# Altium PCB 51-039PCB图（源文件格式）.PcbDoc
Units mil, origin at the board's own origin, x right, y up, seen from the top; angles counter-clockwise.
Board outline 3930 x 3915 mil, 2 copper layers (Top Layer, Bottom Layer); 37 components, 63 nets, 143 pads, 0 vias.
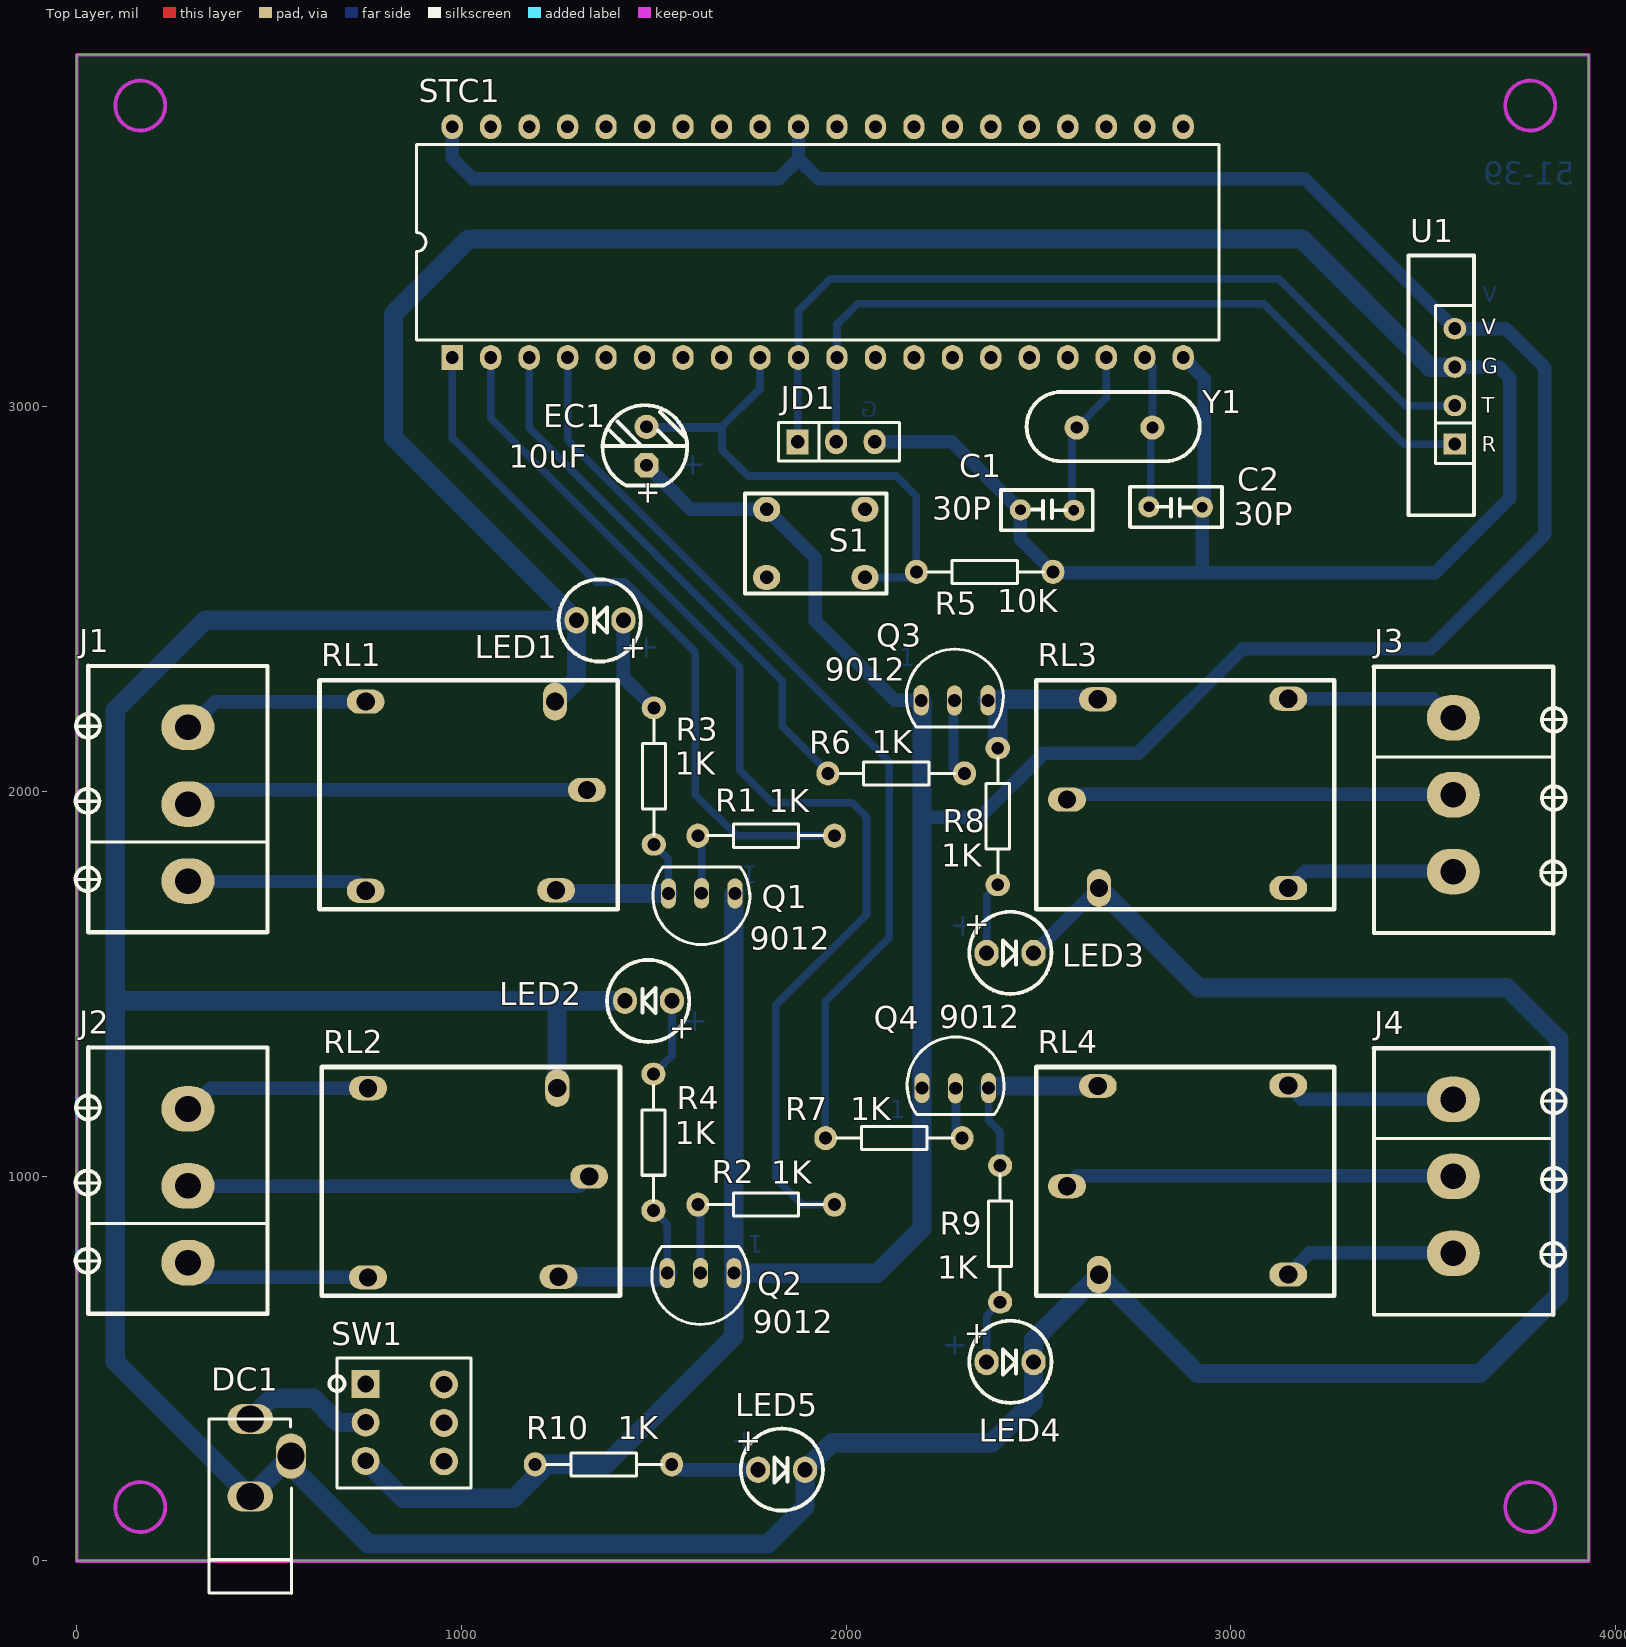
[diagram p0: Top Layer view]
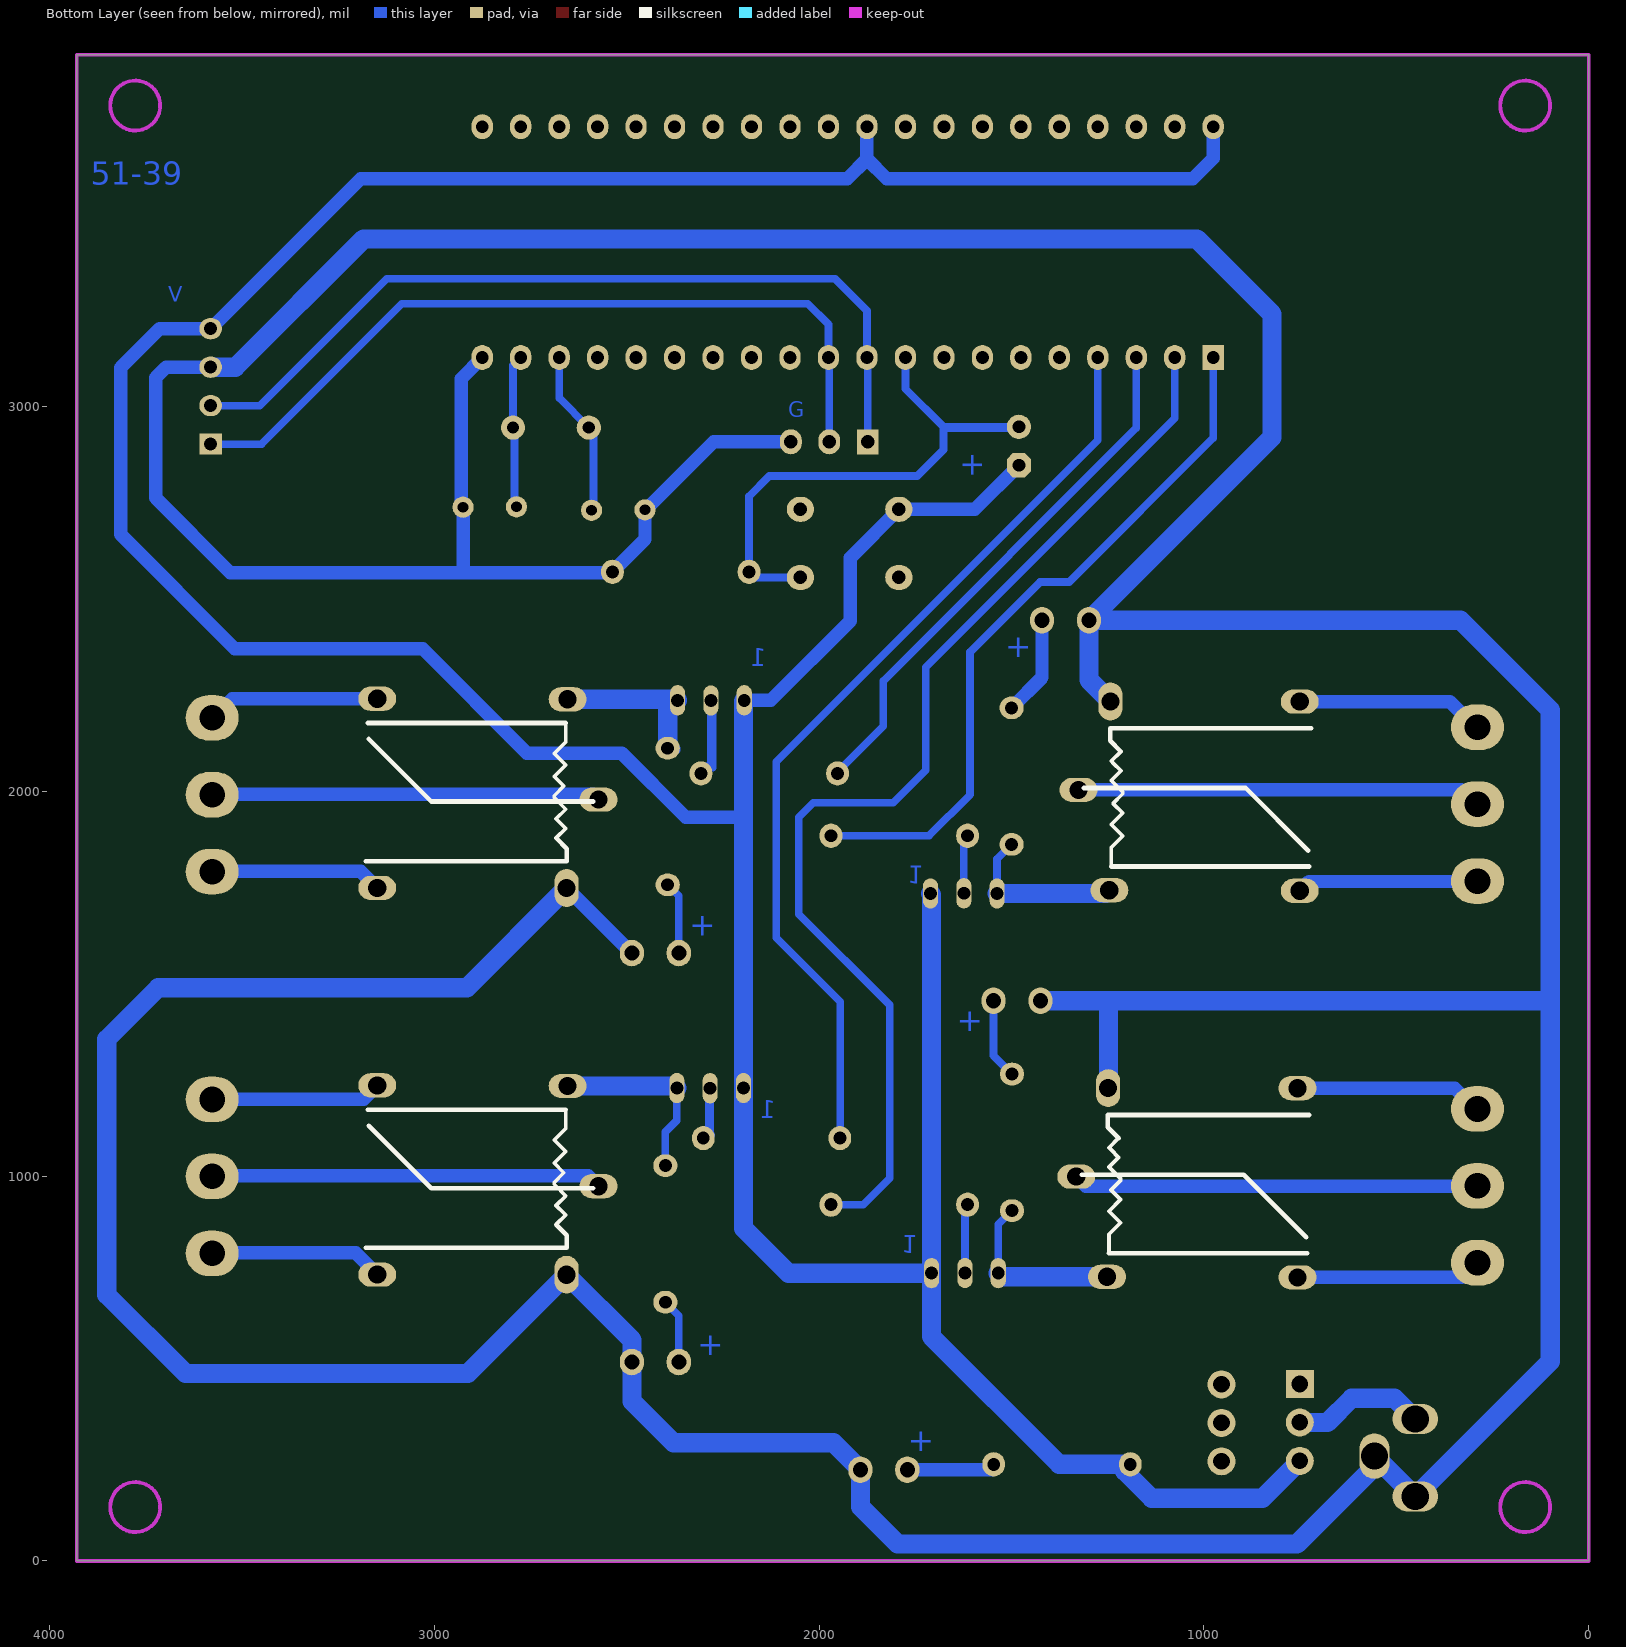
[diagram p1: Bottom Layer view, seen from below]

## Layer stack, top to bottom
Top Solder: solder mask 0.4, Solder Resist, Dk 3.5
Top Layer: signal copper 1.4
Dielectric1: dielectric 12.6, FR-4, Dk 4.8
Bottom Layer: signal copper 1.4
Bottom Solder: solder mask 0.4, Solder Resist, Dk 3.5

## Board outline
0,0 0,3915 3930,3915 3930,0

## Design rules (kind name [scope] priority, off if disabled: settings)
Clearance [All] p1: gap=12
ComponentClearance [All] p1 off: gap=10 collisioncheckmode=3 verticalgap=10 showdistances=FALSE
FabricationTestpoint [(IsPad And (OnTopLayer Or OnBottomLayer))] p1: side=3 testpointundercomponent=TRUE minsize=40 maxsize=100 preferedsize=60 minholesize=0 maxholesize=40 preferedholesize=32 testpointgrid=1 allowsidetop=TRUE allowsidebottom=TRUE usegrid=TRUE gridtolerance=0.01
Height [All] p1 off: minheight=0 maxheight=1000 prefheight=500
HoleSize [All] p1 off: absolutevalues=TRUE maxlimit=100 minlimit=1 maxpercent=80.000 minpercent=20.000
LayerPairs [All] p1 off: enforce=TRUE
PlaneClearance [All] p1 off: clearance=20
PlaneConnect [All] p1 off: planeconnectstyle=Relief reliefexpansion=20 reliefentries=4 reliefconductorwidth=10 reliefairgap=10
PolygonConnect [All] p1 off: connectstyle=Relief reliefconductorwidth=10 reliefentries=4 polygonreliefangle="90 Angle" airgapwidth=10
RoutingVias [All] p1: holewidth=28 width=50 viastyle="Through Hole" minholewidth=28 minwidth=50 maxholewidth=28 maxwidth=50
SilkToSolderMaskClearance SilkscreenOverComponentPads [IsPad] p1: minsilkscreentomaskgap=10 clearancetoexposedcopper=TRUE
SolderMaskExpansion [All] p1: expansion=4
Width [All] p1: maxlimit=100 minlimit=12 preferedwidth=20
22 further rules are at their usual default settings.

## Components (designator, comment, footprint, x,y, rotation, side; value= is the part's Value field where it differs from the comment)
C1 "30P" RAD-0.1 2453,2732 r0 top
C2 "30P" RAD-0.1 2926,2739 r180 top
DC1 "DC接口" DC-JACK-002 451,369 r270 top
EC1 "10uF" RB.1/.2 1481,2848 r90 top
J1 "端子" 5.08三芯接线端子 289,1767 r90 top
J2 "端子" 5.08三芯接线端子 289,775 r90 top
J3 "端子" 5.08三芯接线端子 3578,2191.6 r270 top
J4 "端子" 5.08三芯接线端子 3578,1199.6 r270 top
JD1 "下载口" 下载串口 1874,2909 r90 top
LED1 "YELLOW" LED_D3MM12 1421,2445 r180 top
LED2 "YELLOW" LED_D3MM12 1547,1456 r180 top
LED3 "YELLOW" LED_D3MM12 2365,1580 r0 top
LED4 "YELLOW" LED_D3MM12 2365,517 r0 top
LED5 "RED" LED_D3MM12 1771,237 r0 top
Q1 "9012" TO-92 1711,1735 r180 top
Q2 "9012" TO-92 1708,748 r180 top
Q3 "9012" TO-92 2195,2237 r0 top
Q4 "9012" TO-92 2197,1229 r0 top
R1 "1K" AXIAL0.3 1792,1885 r0 top
R2 "1K" AXIAL0.3 1792,926 r0 top
R3 "1K" AXIAL0.3 1500,2040 r90 top
R4 "1K" AXIAL0.3 1499,1088 r90 top
R5 "10K" AXIAL0.3 2360,2571 r180 top
R6 "1K" AXIAL0.3 2130,2047 r180 top
R7 "1K" AXIAL0.3 2124,1099 r180 top
R8 "1K" AXIAL0.3 2394,1935 r270 top
R9 "1K" AXIAL0.3 2400,850 r270 top
R10 "1K" AXIAL0.3 1369,251 r180 top
RL1 "SRD-05VDC-SL-C" RELAY_5V51BOARD 1326,2004 r180 top
RL2 "SRD-05VDC-SL-C" RELAY_5V51BOARD 1332,999 r180 top
RL3 "SRD-05VDC-SL-C" RELAY_5V51BOARD 2574,1979 r0 top
RL4 "SRD-05VDC-SL-C" RELAY_5V51BOARD 2574,974 r0 top
S1 "BUTTOM" BUTTOM_6X6DIP 1921,2645 r180 top
STC1 "STC89C52" STC89 981,3138 r90 top
SW1 "SW-DPDT" SW 751,460 r270 top
U1 "蓝牙MODE" 蓝牙MODE竖放 3582,2903 r0 top
Y1 "11.0592M" X_HC-49 2796,2946 r180 top

## Footprints (in the part's own frame and the unit in brackets; to place one, negate y for a bottom-side part, rotate by r counter-clockwise, add the part's x,y. Pads: shape width x height; smd on the part's side, far side on the other; paste and mask are expansions set on the pad)
5.08三芯接线端子 [mm]
  oval 3x3.5 hole 1.7: 1(0,0) 2(5.08,0) 3(10.16,0)
  silkscreen extent -3.38,-5.24 14.21,7.42
AXIAL0.3 [mm]
  oval 1.5x1.6 hole 0.85: 1(-4.508,0) 2(4.508,0)
  silkscreen extent -3.87,-0.76 3.75,0.76
BUTTOM_6X6DIP [mm]
  oval 1.8x1.65 hole 0.9: 1(-3.25,2.25) 2(3.25,-2.25) ""(-3.25,-2.25) ""(3.25,2.25)
  round 1 on Top Overlay: 3(0,0)
  silkscreen extent -4.67,-3.3 4.67,3.3
DC-JACK-002 [mm]
  oval 2x3 hole 1.8: 1(0,0) 2(5.12,0)
  oval 3x2 hole 1.8: 3(2.45,2.69)
  silkscreen extent 0,-2.73 11.51,2.73
LED_D3MM12 [mm]
  oval 1.6x1.75 hole 1: 1(0,0) 2(3.1,0)
  silkscreen extent -1.14,-2.7 4.28,2.72
RAD-0.1 [mm]
  round 1.4 hole 0.7: 1(0,0) 2(3.531,-0.025)
  silkscreen extent -1.3,-1.35 4.78,1.32
RB.1/.2 [mm]
  oct 1.6x1.6 hole 0.85: 1(0,0)
  round 1.6 hole 0.85: 2(2.54,0)
  silkscreen extent -1.35,-2.69 3.97,2.9
RELAY_5V51BOARD [mm]
  oval 2.5x1.6 hole 1.2: 1(0,0) 2(14.605,6.658) 3(14.605,-5.835) 4(2.032,6.618)
  oval 1.6x2.5 hole 1.2: 5(2.105,-5.842)
  silkscreen extent -2.03,-7.24 17.65,7.87
STC89 [mm]
  rect 1.65x1.4 hole 0.85: 1(-0.254,0.127)
  oval 1.65x1.4 hole 0.85: 2(-0.254,-2.413) 3(-0.254,-4.953) 4(-0.254,-7.493) 5(-0.254,-10.033) 6(-0.254,-12.573) 7(-0.254,-15.113) 8(-0.254,-17.653) 9(-0.254,-20.193) 10(-0.254,-22.733) 11(-0.254,-25.273) 12(-0.254,-27.813) 13(-0.254,-30.353) 14(-0.254,-32.893) 15(-0.254,-35.433) 16(-0.254,-37.973) 17(-0.254,-40.513) 18(-0.254,-43.053) 19(-0.254,-45.593) 20(-0.254,-48.133) 21(14.986,-48.133) 22(14.986,-45.593) 23(14.986,-43.053) 24(14.986,-40.513) 25(14.986,-37.973) 26(14.986,-35.433) 27(14.986,-32.893) 28(14.986,-30.353) 29(14.986,-27.813) 30(14.986,-25.273) 31(14.986,-22.733) 32(14.986,-20.193) 33(14.986,-17.653) 34(14.986,-15.113) 35(14.986,-12.573) 36(14.986,-10.033) 37(14.986,-7.493) 38(14.986,-4.953) 39(14.986,-2.413) 40(14.986,0.127)
  silkscreen extent 0.92,-50.5 13.82,2.5
SW [mm]
  rect 1.85x1.85 hole 1.1: 1(0,0)
  round 1.85 hole 1.1: 2(2.54,0) 3(5.08,0) 4(5.11,5.169) 5(2.57,5.169) 6(0.03,5.169)
  silkscreen extent -1.71,-2.4 6.88,6.96
TO-92 [mm]
  oval 1x2 hole 0.85: 1(0,0) 2(2.205,-0.009) 3(4.4,0)
  silkscreen extent -0.98,-1.75 5.42,3.38
X_HC-49 [mm]
  round 1.6 hole 0.813: 1(0,0) 2(5.004,0)
  silkscreen extent -3.12,-2.35 8.31,2.22
下载串口 [mm]
  rect 1.65x1.45 hole 0.9: 1(0,0)
  oval 1.65x1.45 hole 0.9: 2(0,-2.54) 3(0,-5.08)
  silkscreen extent -1.27,-6.72 1.27,1.27
蓝牙MODE竖放 [mm]
  rect 1.5x1.4 hole 0.85: 1(0,0)
  oval 1.5x1.4 hole 0.85: 2(0,2.54) 3(0,5.08) 4(0,7.62)
  silkscreen extent -3.05,-4.7 1.27,12.45

## Part data
C1 C2: library part CAP, "无极性电容"
DC1: "DC接口（分大小）"
EC1: library part CAP_EC, "极性电容"
J1 J2 J3 J4: library part CON3, "接线端子3芯"
JD1: "下载口2.54排针"
LED1 LED2 LED3 LED4 LED5: library part LED, "LED灯"
Q1 Q2 Q3 Q4: "直插三极管"
R1 R2 R3 R4 R5 R6 R7 R8 R9 R10: library part RES, "电阻"
RL1 RL2 RL3 RL4: library part RELAY, "继电器"
S1: "按键"
STC1: library part STC51, "51单片机"
SW1: "电源开关"
U1: "蓝牙模块"
Y1: library part "XTAL DIP", "晶振"

## Nets (pads, with @x,y where several pads share a name; then routed paths per layer and width w, separated by ;. In a path a pad name is that pad's centre, name@x,y a point inside that pad or via, vN(x,y) a via of type N, cw(c..) or ccw(c..) an arc to the next point about the centre after c; other vN are vias at no path point)
GND: C1.1 C2.1 DC1.2 DC1.3 JD1.3 LED1.2 LED2.2 LED3.2 LED4.2 LED5.2 R5.1 RL1.5 RL2.5 RL3.5 RL4.5 STC1.20 U1.3 | length 18672.9
  Bottom Layer w35: JD1.3 2274,2909 2448,2735 C1.1@2448,2732 ; C1.1 2453,2655.5 R5.1 2539.5,2569 2917,2569 ; LED3.2 2487.87,1580 RL3.5 ; STC1.20 2931,3073 2931,2736 C2.1@2926,2731 ; C2.1 C2.1@2926,2731 ; U1.3 3698,3103 3725,3076 3725,2763 3531,2569 2917,2569 ; 2917,2569 2926,2578 C2.1@2926,2731
  Bottom Layer w50: RL1.5 1298.95,2289.83 LED1.2 ; RL2.5 1248,1230.13 1248,1456 ; LED2.2 1248,1456 ; RL3.5 2915.87,1490 3718,1490 3852,1356 3852,692 3647,487 2913.87,487 RL4.5 2487.05,574.17 LED4.2 2487.05,415.05 2379,307 1963.05,307 LED5.2 1893.05,141.05 1796,44 758,44 556.91,245.09 DC1.3 451.79,167.43 DC1.2 100,518.43 100,1470 ; U1.3 3518,3103 3185,3436 1018,3436 823,3241 823,2920.95 LED1.2 ; 100,1470 114,1456 1248,1456 ; 100,1470 100,2212 333,2445 LED1.2
NetDC1_1: DC1.1 SW1.2 | length 348.5
  Bottom Layer w50: DC1.1 505,423 616,423 679,360 SW1.2
NetEC1_2: EC1.2 R5.2 S1.1 STC1.9 | length 1569.5
  Bottom Layer w20: EC1.2@1477,2948 1477,2944 1674,2944 ; EC1.2 1677,2948 ; STC1.9 1776,3047 1677,2948 ; S1.1 2167.92,2556.42 R5.2 2182.5,2767.5 2130,2820 1745,2820 1677,2888 1677,2948
NetJ1_1: J1.1 RL1.2 | length 468
  Bottom Layer w35: J1.1@293,1766 726.87,1766 RL1.2
NetJ1_2: J1.2 RL1.1 | length 995
  Bottom Layer w35: J1.2@331,2004 RL1.1
NetJ1_3: J1.3 RL1.3 | length 486.1
  Bottom Layer w35: J1.3@293,2166 360.72,2233.72 RL1.3
NetJ2_1: J2.1 RL2.2 | length 479.4
  Bottom Layer w35: J2.1@293,774 330.13,736.87 RL2.2
NetJ2_2: J2.2 RL2.1 | length 1049.4
  Bottom Layer w35: J2.2@293,974 1307,974 RL2.1
NetJ2_3: J2.3 RL2.3 | length 486.7
  Bottom Layer w35: J2.3@293,1174 347.72,1228.72 RL2.3
NetJ3_1: J3.1 RL3.2 | length 445.1
  Bottom Layer w35: RL3.2 3525.47,2241.13 J3.1@3574,2192.6
NetJ3_2: J3.2 RL3.1 | length 1005.6
  Bottom Layer w35: RL3.1 2587.6,1992.6 J3.2@3574,1992.6
NetJ3_3: J3.3 RL3.3 | length 442.9
  Bottom Layer w35: RL3.3 3192.32,1792.6 J3.3@3574,1792.6
NetJ4_1: J4.1 RL4.2 | length 439.7
  Bottom Layer w35: RL4.2 3184.53,1200.6 J4.1@3574,1200.6
NetJ4_2: J4.2 RL4.1 | length 1011
  Bottom Layer w35: RL4.1 2600.6,1000.6 J4.2@3574,1000.6
NetJ4_3: J4.3 RL4.3 | length 448.3
  Bottom Layer w35: RL4.3 3205.32,800.6 J4.3@3574,800.6
NetLED1_1: LED1.1 R3.2 | length 260.2
  Bottom Layer w35: LED1.1 1421,2296.5 R3.2
NetLED2_1: LED2.1 R4.2 | length 210.4
  Bottom Layer w20: R4.2 1547,1313.5 LED2.1
NetLED3_1: LED3.1 R8.2 | length 189.5
  Bottom Layer w20: LED3.1 2365,1728.5 R8.2
NetLED4_1: LED4.1 R9.2 | length 170
  Bottom Layer w20: LED4.1 2365,637.5 R9.2
NetLED5_1: LED5.1 R10.1 | length 220.5
  Bottom Layer w35: R10.1@1550.5,237 LED5.1
NetQ1_2: Q1.2 R1.1 | length 149.8
  Bottom Layer w20: Q1.2 1624.19,1884.69 R1.1@1624.5,1885
NetQ1_3: Q1.3 R3.1 RL1.4 | length 438.4
  Bottom Layer w20: R3.1 1537.77,1824.73 Q1.3
  Bottom Layer w50: RL1.4 1254.45,1735 Q1.3
NetQ2_2: Q2.2 R2.1 | length 179
  Bottom Layer w20: Q2.2 1621.19,922.69 R2.1@1624.5,926
NetQ2_3: Q2.3 R4.1 RL2.4 | length 464
  Bottom Layer w20: R4.1 1534.77,874.73 Q2.3
  Bottom Layer w50: RL2.4 1525.22,738.45 Q2.3
NetQ3_2: Q3.2 R6.1 | length 369.6
  Bottom Layer w20: 2276.5,2062 Q3.2@2276.5,2231.34 ; Q3.2 2281.81,2072.69 R6.1
NetQ3_3: Q3.3 R8.1 RL3.4 | length 427.2
  Bottom Layer w20: R8.1@2370.78,2107.28 R8.1@2370.78,2112.5
  Bottom Layer w50: R8.1 2394,2211.23 Q3.3 2370.78,2239.55 RL3.4
NetQ4_2: Q4.2 R7.1 | length 261.2
  Bottom Layer w20: R7.1@2280.5,1107 R7.1@2287,1113.5 ; Q4.2@2280.5,1225.34 Q4.2@2283.81,1222.03 ; Q4.2 Q4.2@2283.81,1222.03 ; R7.1 R7.1@2287,1113.5 ; Q4.2@2283.81,1222.03 2283.81,1116.69 R7.1@2287,1113.5 ; Q4.2@2283.81,1222.03 2287.6,1218.24 2287.6,1114.1 R7.1@2287,1113.5
NetQ4_3: Q4.3 R9.1 RL4.4 | length 499.9
  Bottom Layer w20: Q4.3 2370.23,1144.77 2400,1115 R9.1
  Bottom Layer w50: Q4.3 2375.78,1234.55 RL4.4
P00: STC1.39
P01: STC1.38
P02: STC1.37
P03: STC1.36
P04: STC1.35
P05: STC1.34
P06: STC1.33
P07: STC1.32
P10: R1.2 STC1.1 | length 1837.8
  Bottom Layer w20: STC1.1 976,2919 1350.5,2544.5 1426,2544.5 1608,2362.5 1608,1992 1715,1885 R1.2@1959.5,1885
P11: R2.2 STC1.2 | length 2938.4
  Bottom Layer w20: STC1.2 1076,2970 1723,2323 1723,2055 1807.5,1970.5 2015.5,1970.5 2053,1933 2053,1681 1817,1445 1817,995 1886,926 R2.2
P12: R6.2 STC1.3 | length 1383.1
  Bottom Layer w20: STC1.3 1176,2945 1834,2287 1834,2169.5 R6.2@1941.5,2062
P13: R7.2 STC1.4 | length 2436.2
  Bottom Layer w20: STC1.4 1276,2913 2112,2077 2112,1620 1945.5,1453.5 R7.2@1945.5,1107
P14: STC1.5
P15: STC1.6
P16: STC1.7
P17: STC1.8
P20: STC1.21
P21: STC1.22
P22: STC1.23
P23: STC1.24
P24: STC1.25
P25: STC1.26
P26: STC1.27
P27: STC1.28
P30: JD1.1 STC1.10 U1.2 | length 2216.1
  Bottom Layer w20: JD1.1 STC1.10@1874,3126 ; STC1.10 1876,3250 1959,3333 3124,3333 3454,3003 U1.2
P31: JD1.2 STC1.11 U1.1 | length 2082.6
  Bottom Layer w20: JD1.2 STC1.11@1974,3126 ; STC1.11 1976,3214 2030,3268 3085,3268 3450,2903 U1.1
P32: STC1.12
P33: STC1.13
P34: STC1.14
P35: STC1.15
P36: STC1.16
P37: STC1.17
VCC: EC1.1 Q1.1 Q2.1 Q3.1 Q4.1 R10.2 S1.2 STC1.31 STC1.40 SW1.3 U1.4 | length 10945.6
  Bottom Layer w35: STC1.40 976,3646 1029,3593 1825,3593 1876,3644 ; EC1.1 1595.42,2733.58 S1.2 1919,2607.63 1919,2444 2126,2237 Q3.1 ; STC1.31 1876,3644 ; 2197,1933 2347,1933 2514,2100 2760,2100 3031,2371 3519,2371 3816,2668 3816,3102 3715,3203 U1.4 3192,3593 1927,3593 1876,3644
  Bottom Layer w50: SW1.3 848,163 1136,163 1206,233 1206,246.5 1201.5,251 1376,251 1708,583 Q2.1 ; Q1.1 1708,1732 Q2.1 ; Q3.1 2197,2235 2197,1933 Q4.1 2197,865 2080,748 Q2.1
X1: C1.2 STC1.18 Y1.2 | length 413.9
  Bottom Layer w20: C1.2@2587,2734 Y1.2@2587,2934 ; Y1.2 2676,3023 STC1.18
X2: C2.2 STC1.19 Y1.1 | length 367
  Bottom Layer w20: C2.2@2792,2737 Y1.1@2792,2942 ; Y1.1 STC1.19@2796,3108
pads on no net: S1. S1.3 STC1.29 STC1.30 SW1.1 SW1.4 SW1.5 SW1.6

## Keep-outs
Keep-Out Layer:
  circle w10: c165.04,140 r64.96
  circle w10: c165.04,3783 r64.96
  circle w10: c3778.04,3783 r64.96
  circle w10: c3778.04,140 r64.96
  lines w10: 0,0 3930,0 3930,3915 0,3915 0,0

## Other copper
Bottom Layer:
  text "51-39" at 3894,3577 h60

## Dimensions
-1,3907 to 6,-2 on Top Overlay
3930,3922 to 0,3915 on Top Overlay

## Text inside footprints (layer, text, board x,y; h text height)
EC1: Top Overlay "+" at 1510,2741 h60 r90; Bottom Layer "+" at 1627,2814 h60 r90
JD1: Bottom Layer "G" at 2081,2973 h40
LED1: Top Overlay "+" at 1481,2397 h60 r180; Bottom Layer "+" at 1516,2400 h60 r180
LED2: Top Overlay "+" at 1607,1408 h60 r180; Bottom Layer "+" at 1642,1428 h60 r180
LED3: Top Overlay "+" at 2305,1628 h60; Bottom Layer "+" at 2269,1625 h60
LED4: Top Overlay "+" at 2305,565 h60; Bottom Layer "+" at 2248,534 h60
LED5: Top Overlay "+" at 1711,285 h60; Bottom Layer "+" at 1701,285 h60
Q1: Bottom Layer "1" at 1770,1807 h47.24 r180
Q2: Bottom Layer "1" at 1786,846 h47.24 r180
Q3: Bottom Layer "1" at 2138,2325 h47.24
Q4: Bottom Layer "1" at 2113,1151 h47.24
U1: Top Overlay "T" at 3652,2984.67 h40; Top Overlay "G" at 3652,3086.33 h40; Top Overlay "R" at 3652,2883 h40; Top Overlay "V" at 3652,3188 h40; Bottom Layer "V" at 3692,3273 h40